# Altium PCB HIP4081A_rev1_pcb.PcbDoc
Units mil, origin at the board's own origin, x right, y up, seen from the top; angles counter-clockwise.
Board outline 3000 x 3000 mil, 2 copper layers (Top Layer, Bottom Layer); 26 components, 24 nets, 118 pads, 10 vias.
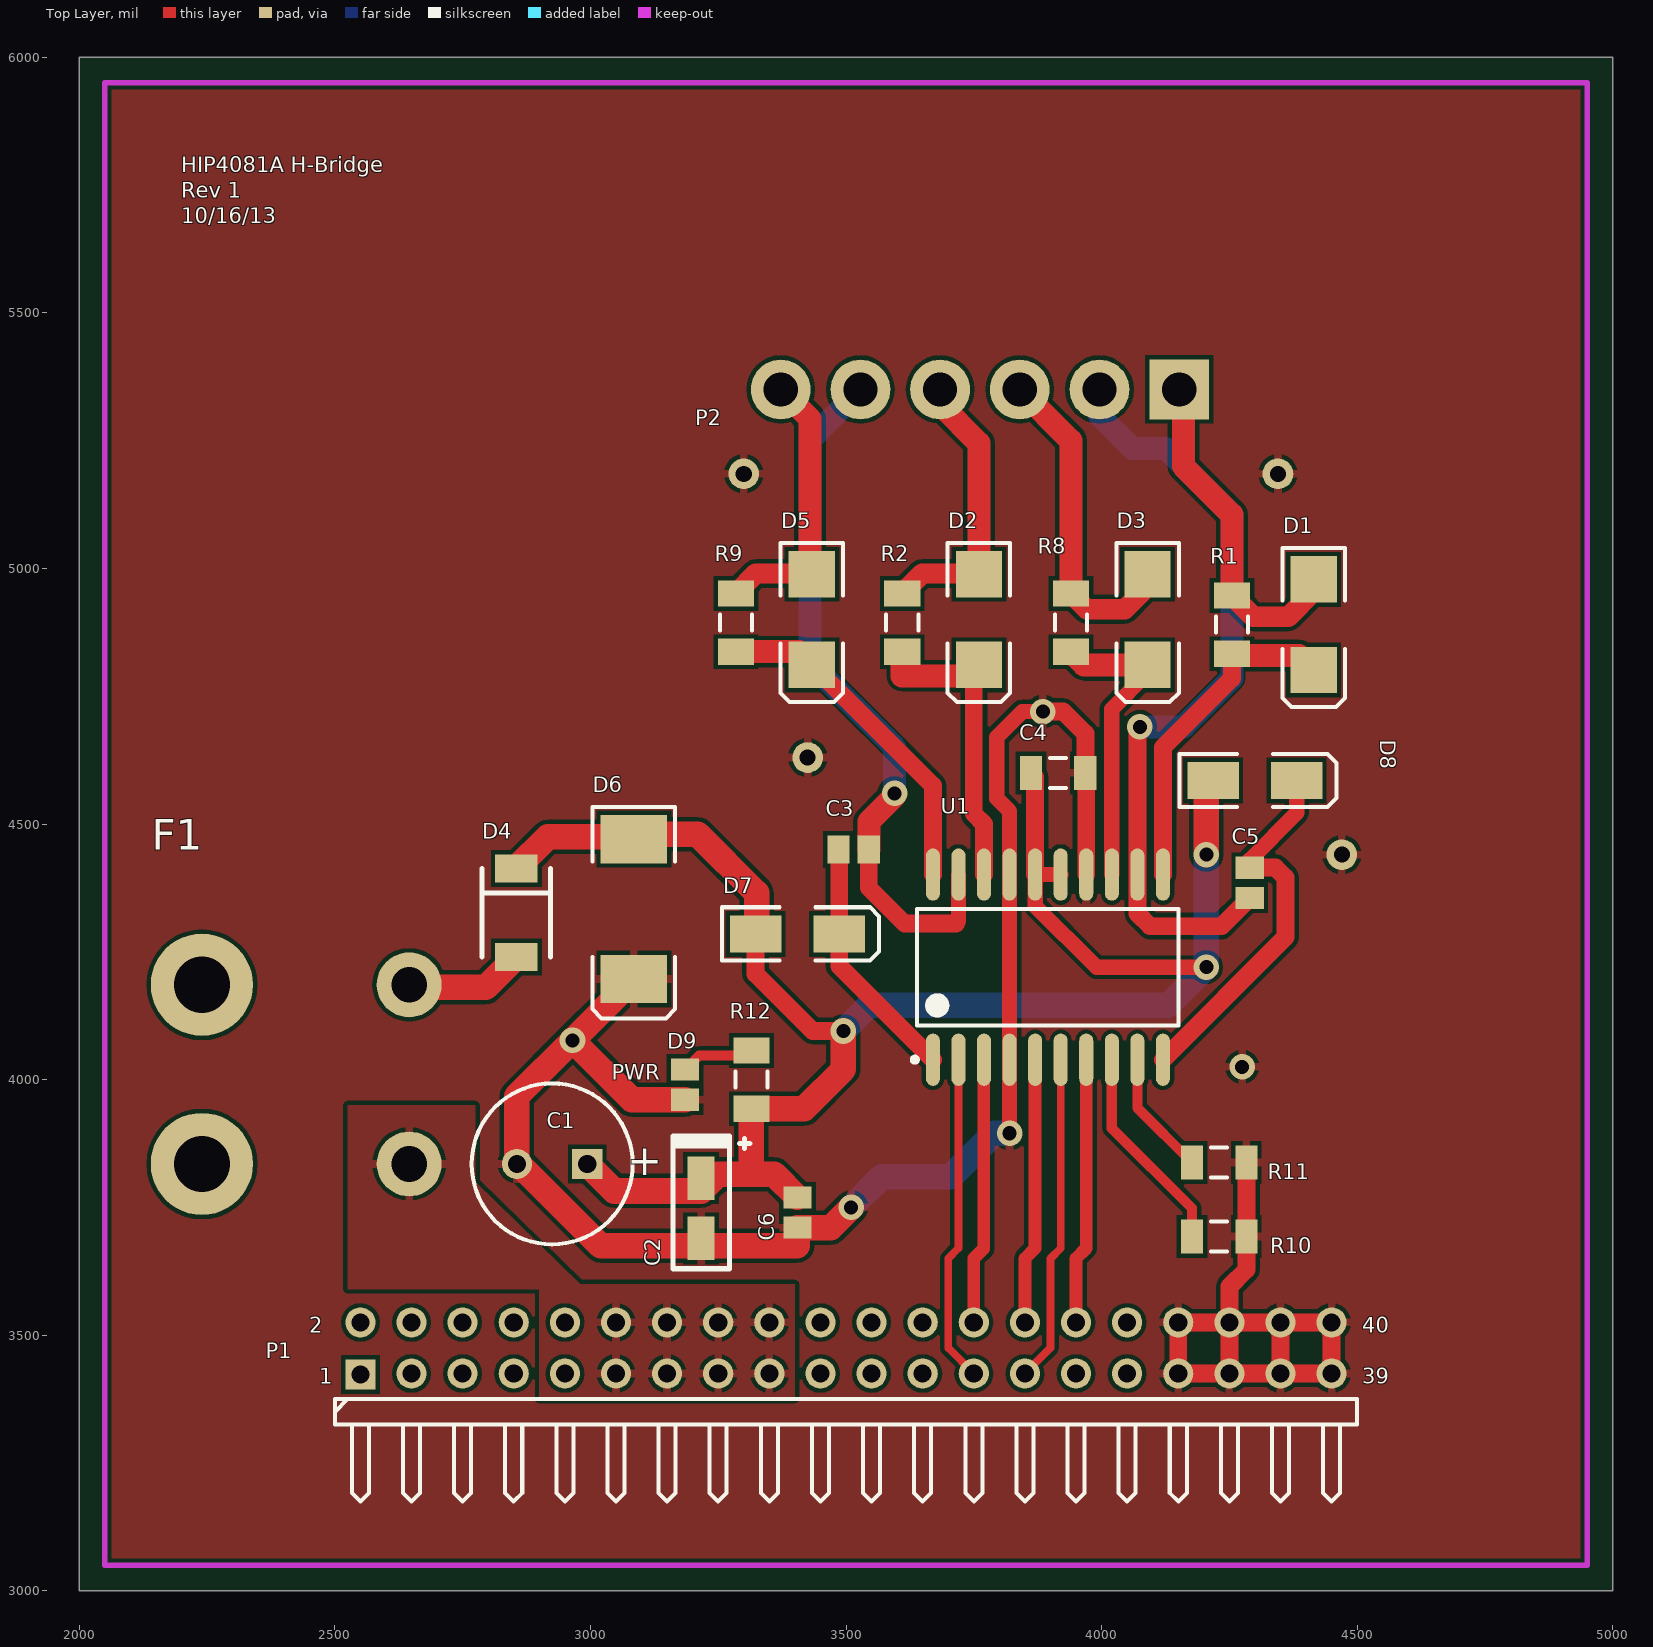
[diagram p0: Top Layer view]
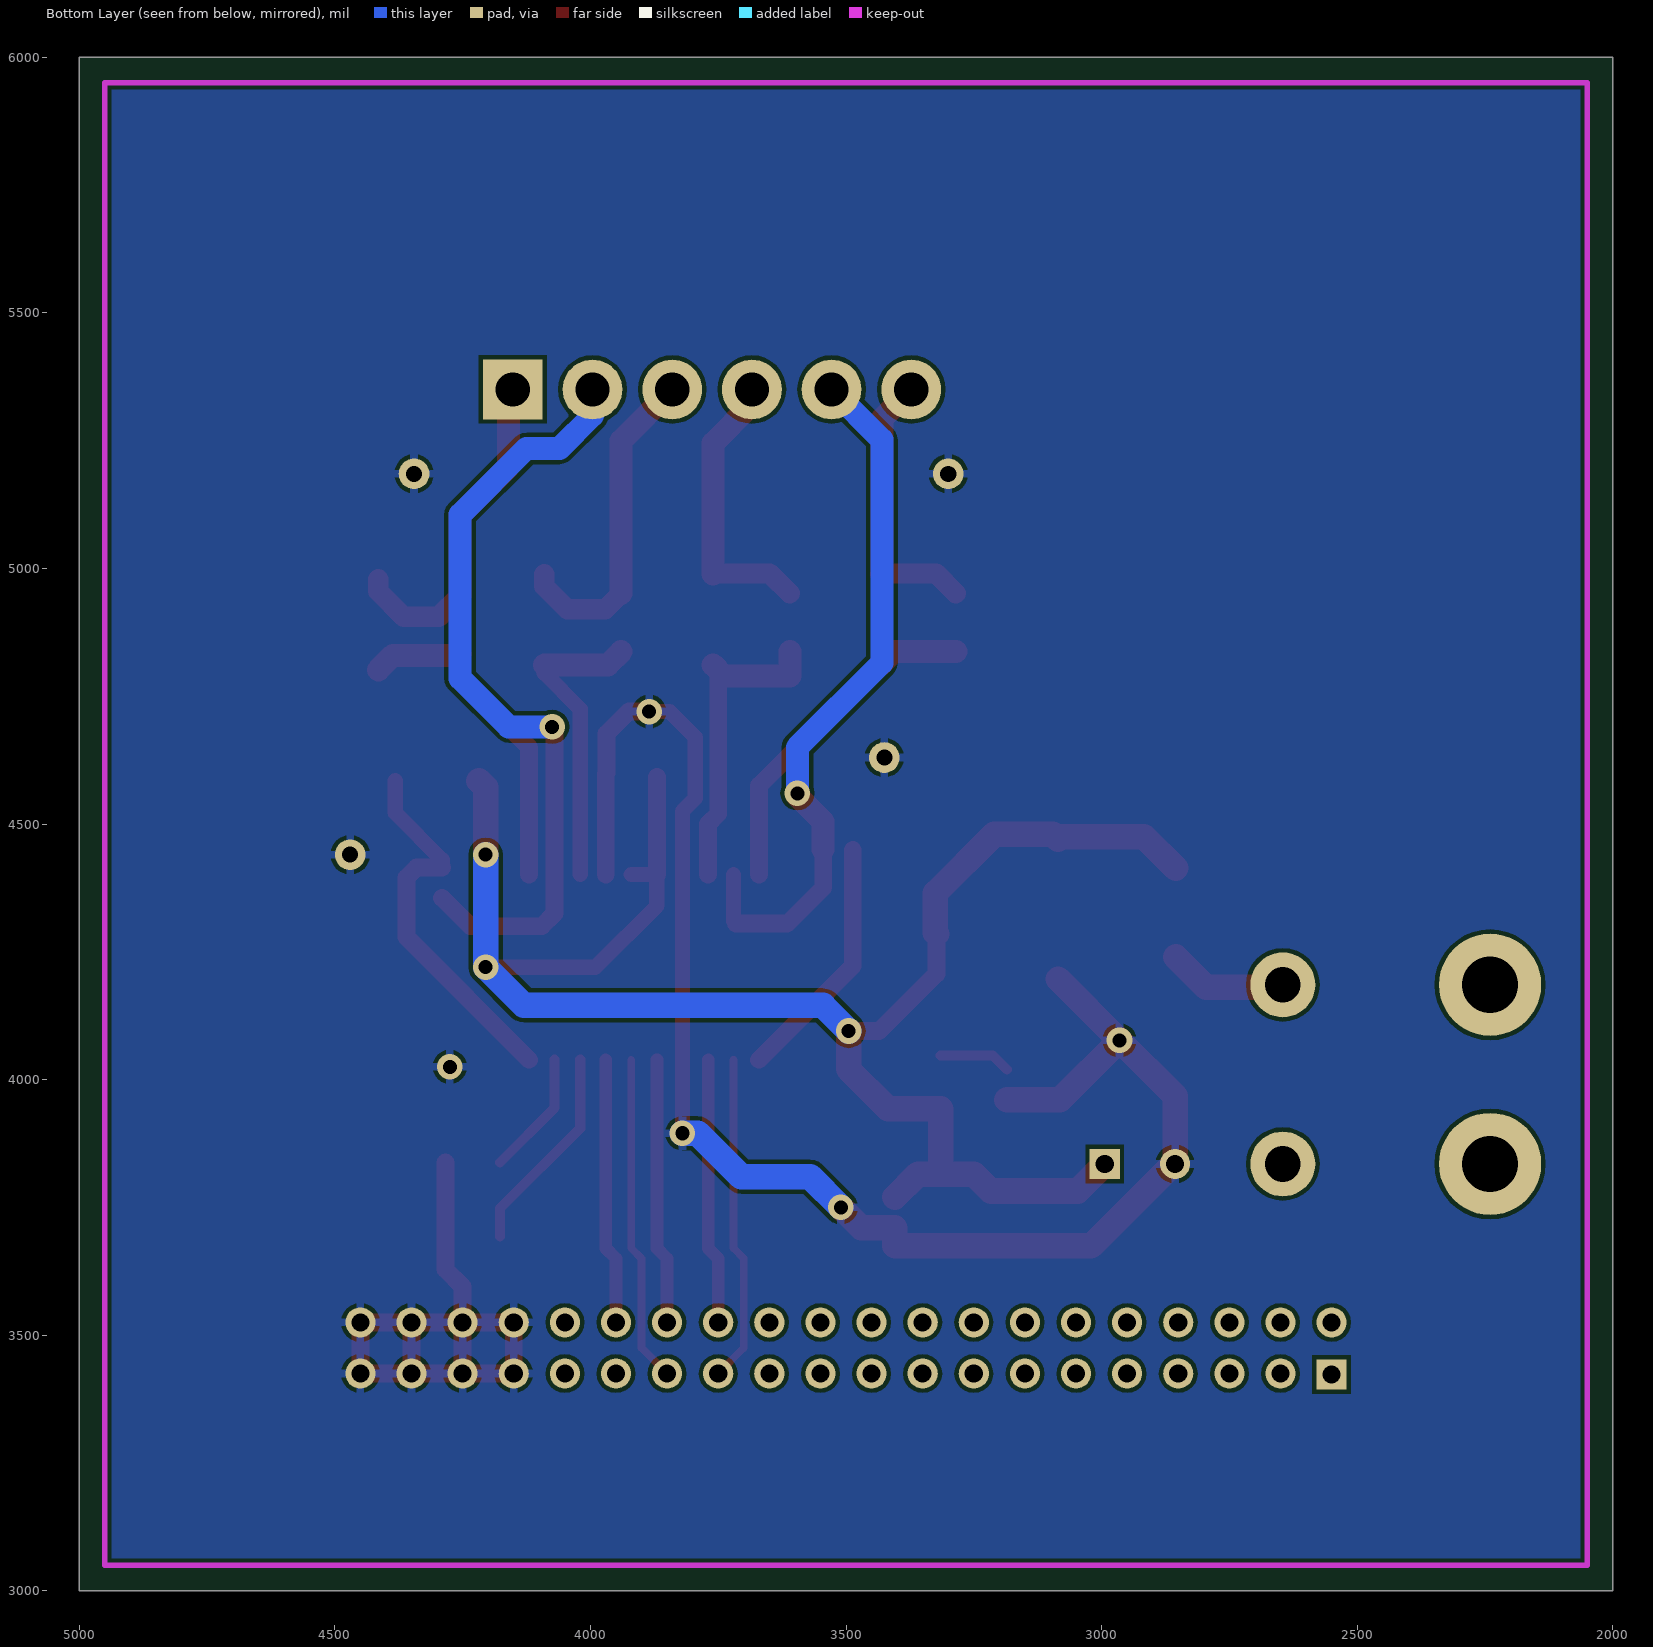
[diagram p1: Bottom Layer view, seen from below]

## Layer stack, top to bottom
Top Layer: signal copper 1.4
Dielectric: dielectric 12.6, FR-4, Dk 4.8
Bottom Layer: signal copper 1.4

## Board outline
2000,3000 5000,3000 5000,6000 2000,6000

## Design rules (kind name [scope] priority, off if disabled: settings)
Clearance [All] p1: gap=8
Height [All] p1: minheight=0 maxheight=4500 prefheight=500
HoleSize [All] p1: absolutevalues=TRUE maxlimit=120 minlimit=1 maxpercent=80.000 minpercent=20.000
MinimumSolderMaskSliver [All] p1: minsoldermaskwidth=5.6
PlaneConnect [All] p1: planeconnectstyle=Relief reliefexpansion=15 reliefentries=4 reliefconductorwidth=12 reliefairgap=25
PolygonConnect PolygonConnect_12v [InNamedPolygon('12v_Batt')] p1: connectstyle=Relief reliefconductorwidth=16 reliefentries=4 polygonreliefangle="90 Angle"
PolygonConnect [All] p2: connectstyle=Relief reliefconductorwidth=16 reliefentries=4 polygonreliefangle="90 Angle"
RoutingVias [All] p1: holewidth=27.56 width=50 viastyle="Through Hole" minholewidth=23.62 minwidth=50 maxholewidth=31.5 maxwidth=50
SilkscreenOverComponentPads [All] p1: minsilkscreentomaskgap=10
SolderMaskExpansion [All] p1: expansion=5
Width "Input Signal Nets" [(InNet('AHI') OR InNet('ALI') OR InNet('BHI') OR InNet('BLI')) OR InNet('DIS')] p1: maxlimit=35 minlimit=10 preferedwidth=25 toplayer_prefwidth=15 bottomlayer_minwidth=25 minimp=50.000000 maximp=50.000000 favimp=50.000000
Width Gate_Drive_Nets [(InNet('NetD1_1') OR InNet('NetD2_1') OR InNet('NetD3_1') OR InNet('NetD5_1') OR InNet('BHS') OR InNet('AHS')) OR InNet('BLO') OR InNet('BHO') OR InNet('ALO') OR InNet('AHO') OR InNet('NetC5_2') OR InNet('NetC3_2')] p2: maxlimit=45 minlimit=30 preferedwidth=35 minimp=50.000000 maximp=50.000000 favimp=50.000000
Width Power_Nets [InNet('NetD4_1')] p3: maxlimit=50 minlimit=50 preferedwidth=50 minimp=50.000000 maximp=50.000000 favimp=50.000000
Width Power_Width [(InNet('12V BATTERY') OR InNet('+12V') OR InNet('GND'))] p4: maxlimit=50 minlimit=30 preferedwidth=50 bottomlayer_minwidth=35 bottomlayer_prefwidth=35 minimp=50.000000 maximp=50.000000 favimp=50.000000
Width [All] p5: maxlimit=20 minlimit=12 preferedwidth=12 minimp=50.000000 maximp=50.000000 favimp=50.000000
23 further rules are at their usual default settings.

## Components (designator, comment, footprint, x,y, rotation, side; value= is the part's Value field where it differs from the comment)
C1 "Cap Alum" CAPPR3.5-8x11.5 2925,3835 r180 top
C2 "Cap Tant" CP1206 3216.65,3750 r270 top
C3 "0805" C0805 3515,4450 r180 top
C4 "0805" C1206 3915,4600 r0 top
C5 "0805" C0805 4290,4385 r90 top
C6 "0805" C0805 3405,3740 r90 top
D1 "D Schottky" SMB 4415,4890 r270 top
D2 "D Schottky" SMB 3760,4900 r270 top
D3 "D Schottky" SMB 4090,4900 r270 top
D4 "PMEG3030EP,115" SOD128 2855,4240 r90 top
D5 "D Schottky" SMB 3433.17,4900 r270 top
D6 "TVS" DSO-C2/X3.3 3085,4333.5 r270 top
D7 "Diode" DSO-C2/G1.6 3405,4285 r0 top
D8 "Diode" DSO-C2/G1.6 4300,4585 r0 top
D9 "LED2" C0805 3185,3990 r270 top
F1 "Fuse 2" "3550-2 ATC Fuse Holder" 2240,3835 r270 top
P1 "Header 20X2H" HDR2X20H 2550,3425 r0 top
P2 "Header 6" B6PS-VH 3840,5350 r180 top
R1 "1206" RESC3216N 4255,4890 r270 top
R2 "1206" RESC3216N 3610,4894.09 r270 top
R8 "1206" RESC3216N 3940,4894.09 r270 top
R9 "1206" RESC3216N 3285,4894.09 r270 top
R10 "1206" C1206 4230,3692.87 r180 top
R11 "1206" C1206 4230,3837.87 r180 top
R12 "1206" RESC3216N 3315,4000 r270 top
U1 "HIP4081A" SOIC127P1030-20M 3895,4220 r90 top

## Footprints (in the part's own frame and the unit in brackets; to place one, negate y for a bottom-side part, rotate by r counter-clockwise, add the part's x,y. Pads: shape width x height; smd on the part's side, far side on the other; paste and mask are expansions set on the pad)
"3550-2 ATC Fuse Holder" [mil]
  round 127 hole 70: 1(0,405.51) 2(-350.39,405.51)
  round 200 hole 110: 3(0,0) 4(-350.39,0)
  body extent -585,-5 235,395, height 214
B6PS-VH [mm]
  rect 2.972x2.972 hole 1.702: 1(-7.92,0)
  round 2.972 hole 1.702: 2(-3.96,0) 3(0,0) 4(3.96,0) 5(7.92,0) 6(11.88,0)
  body extent -9.91,-14.99 13.97,1.9, height 10.5
C0805 [mm] "Chip Capacitor, Body 2.0x1.3mm, IPC High Density"
  rect 1.1x1.4 smd: 1(-0.75,0) 2(0.75,0)
  body extent -1.1,-0.72 1.1,0.72, height 1.4
C1206 [mm] "Chip Capacitor, Body 3.2x1.6mm, IPC High Density"
  rect 1.1x1.7 smd: 1(-1.35,0) 2(1.35,0)
  silkscreen extent -0.4,-0.75 0.4,0.75, body extent -1.7,-0.9 1.7,0.9, height 1.3
CAPPR3.5-8x11.5 [mm] "Capacitor, Electrolytic, Radial; Body 8 x 11.5 mm (Dia.xH typ); Pin Spacing 3.5 mm (typ)"
  rect 1.5x1.5 hole 0.9: 1(-1.75,0)
  round 1.5 hole 0.9: 2(1.75,0)
  silkscreen extent -4,-4 4,4
CP1206 [mm] "1206 [ 3216 ] Polarized Pin 1 anode"
  rect 2.15x1.35 smd: 1(-1.45,0) 2(1.54,0)
  silkscreen extent -3.56,-1.4 3.05,2.41
DSO-C2/G1.6 [mm] "DO-214-AC/SMA; 2 C-Bend Leads; Body 5.3 x 2.6 mm, inc. leads (LxW)"
  rect 2.55x1.85 smd: 1(-2.075,0) 2(2.075,0)
  silkscreen extent -3.75,-1.33 4.05,1.33
DSO-C2/X3.3 [mm] "DO-214-AB/SMC; 2 C-Bend Leads; Body 7.9 x 5.9 mm, inc. leads (LxW)"
  rect 2.4x3.3 smd: 1(-3.475,0) 2(3.475,0)
  silkscreen extent -5.07,-2.05 5.43,2.05
HDR2X20H [mm] "Connector; Header; 20x2 Position; Right Angle"
  rect 1.5x1.5 hole 0.9: 1(0,-0.051)
  round 1.5 hole 0.9: 2(0,2.54) 3(2.54,0) 4(2.54,2.54) 5(5.08,0) 6(5.08,2.54) 7(7.62,0) 8(7.62,2.54) 9(10.16,0) 10(10.16,2.54) 11(12.7,0) 12(12.7,2.54) 13(15.24,0) 14(15.24,2.54) 15(17.78,0) 16(17.78,2.54) 17(20.32,0) 18(20.32,2.54) 19(22.86,0) 20(22.86,2.54) 21(25.4,0) 22(25.4,2.54) 23(27.94,0) 24(27.94,2.54) 25(30.48,0) 26(30.48,2.54) 27(33.02,0) 28(33.02,2.54) 29(35.56,0) 30(35.56,2.54) 31(38.1,0) 32(38.1,2.54) 33(40.64,0) 34(40.64,2.54) 35(43.18,0) 36(43.18,2.54) 37(45.72,0) 38(45.72,2.54) 39(48.26,0) 40(48.26,2.54)
  silkscreen extent -1.27,-6.35 49.53,-1.27
RESC3216N [mm] "Chip Resistor, Body 3.2x1.6mm, IPC Medium Density"
  rect 1.3x1.8 smd: 1(-1.45,0) 2(1.45,0)
  silkscreen extent -0.4,-0.8 0.4,0.8, body extent -1.68,-0.87 1.68,0.87, height 0.71
SMB [mm] "DO-214-AA/SMB; 2 C-Bend Leads; Body 5.3 x 3.6 mm, inc. leads (LxW)"
  rect 2.3x2.3 smd: 1(-2.25,0) 2(2.25,0)
  silkscreen extent -3.8,-1.55 4.1,1.55
SOD128 [mm] "SOD 128 Diode"
  rect 1.4x2.1 smd: 1(0,0) 2(4.4,0)
  silkscreen extent 0,-1.7 4.4,1.7
SOIC127P1030-20M [mm] "SOIC, 20-Leads, Body 12.8x7.5mm, Pitch 1.27mm, IPC Low Density"
  oval 2.6x0.7 smd: 1(-4.6,5.715) 2(-4.6,4.445) 3(-4.6,3.175) 4(-4.6,1.905) 5(-4.6,0.635) 6(-4.6,-0.635) 7(-4.6,-1.905) 8(-4.6,-3.175) 9(-4.6,-4.445) 10(-4.6,-5.715) 11(4.6,-5.715) 12(4.6,-4.445) 13(4.6,-3.175) 14(4.6,-1.905) 15(4.6,-0.635) 16(4.6,0.635) 17(4.6,1.905) 18(4.6,3.175) 19(4.6,4.445) 20(4.6,5.715)
  silkscreen extent -4.72,-6.5 2.9,6.74, body extent -3.75,-6.5 3.75,6.5, height 2.65

## Part data
C1: library part "Cap Pol1", "Polarized Capacitor (Radial)"
C2: library part "Cap Pol3", "Polarized Capacitor (Surface Mount)"
C3 C4 C5 C6: library part "Cap Semi", "Capacitor (Semiconductor SIM Model)"
D1 D2 D3 D5: "Schottky Diode"
D4: library part "D Schottky"
D6: library part TVS_Bi, "Bi-directional TVS diode"
D7 D8: "Default Diode"
D9: "Ultra Bright YELLOW ORANGE AlInGaP LED"
F1: "Fuse"
P1: "Header, 20-Pin, Dual row, Right Angle"
P2: "Header, 6-Pin"
R1 R2 R8 R9 R10 R11 R12: library part Res3, "Resistor"
U1: "80V/2.5A Peak, High Frequency Full Bridge FET Driver"

## Free pads (board coordinates)
  round 60 hole 31.5: 1(3300,5185) 2(3425,4630) 3(4345,5185) 4(4470,4440)

## Via types
v1: diameter 50, hole 27.56, Top Layer to Bottom Layer, 10 vias

## Nets (pads, with @x,y where several pads share a name; then routed paths per layer and width w, separated by ;. In a path a pad name is that pad's centre, name@x,y a point inside that pad or via, vN(x,y) a via of type N, cw(c..) or ccw(c..) an arc to the next point about the centre after c; other vN are vias at no path point)
"12V BATTERY": F1.1 P1.11 P1.12 P1.13 P1.14 P1.15 P1.16 P1.17 P1.18
+12V: C1.1 C2.1 C4.1 C6.2 D4.2 D6.1 D7.1 D8.1 R12.2 U1.15 U1.16 | length 3617.7
  Top Layer w30: U1.15 U1.16 3870,4340 3990,4220 v1(4205,4220)
  Top Layer w35: D7.1@3322.91,4285.39 D7.1 3323.31,4206.69 3435,4095 v1(3495,4095) ; U1.16 C4.1@3870,4591.85
  Top Layer w50: D4.2 2916.77,4475 3080.31,4475 D6.1 3094.69,4480 3210,4480 3325,4365 3325,4287.48 D7.1@3322.91,4285.39 ; C1.1 3046.81,3782.09 3216.65,3782.09 3249.57,3815 3359.53,3815 C6.2 ; 3315,3815 R12.2@3315,3935 ; R12.2 3417.91,3942.91 3495,4020 v1(3495,4095) ; v1(4205,4440) 4205,4571.69 D8.1
  Bottom Layer w50: v1(3495,4095) 3545,4145 4130,4145 v1(4205,4220) v1(4205,4440)
AHI: P1.30 U1.7 | length 522.2
  Top Layer w25: P1.30 3950,3650 3970,3670 U1.7
AHO: D1.2 R1.2 U1.11 | length 660.8
  Top Layer w35: U1.11 4120,4650 4255,4785 R1.2
  Top Layer w45: R1.2 4257.91,4830 4386.42,4830 D1.2
AHS: C5.1 P2.2 U1.12 | length 1550.2
  Top Layer w35: v1(4075,4690) 4070,4685 U1.12 4070,4325 4095,4300 4234.53,4300 C5.1
  Bottom Layer w45: P2.2 3995.91,5299.09 4060,5235 4125,5235 4255,5105 4255,4785 4160,4690 v1(4075,4690)
ALI: P1.27 U1.6 | length 642.9
  Top Layer w15: P1.27 3900,3475 3900,3650 3920,3670 U1.6
ALO: D3.2 R8.2 U1.13 | length 599.9
  Top Layer w30: U1.13 4020,4725 4090,4795 D3.2
  Top Layer w45: R8.2 3965.59,4811.42 D3.2
BHI: P1.25 U1.2 | length 642.9
  Top Layer w15: U1.2 3720,3670 3700,3650 3700,3475 P1.25
BHO: D5.2 R9.2 U1.20 | length 667.4
  Top Layer w35: D5.2@3433.58,4811.42 3670,4575 U1.20
  Top Layer w45: R9.2 3407.58,4837.01 D5.2 D5.2@3433.58,4811.42
BHS: C3.1 P2.5 U1.19 | length 1402.3
  Top Layer w30: 3715,4305 3720,4310 U1.19
  Top Layer w35: C3.1 3544.53,4375.47 3615,4305 3715,4305
  Top Layer w45: C3.1 3544.53,4504.53 3595,4555 v1(3595,4560)
  Bottom Layer w45: P2.5 3430,5251.81 3430,4815 3595,4650 v1(3595,4560)
BLI: P1.28 U1.5 | length 522.2
  Top Layer w25: P1.28 3850,3650 3870,3670 U1.5
BLO: D2.2 R2.2 U1.18 | length 614.5
  Top Layer w30: D2.2@3738.58,4790 D2.2@3750,4801.42
  Top Layer w35: D2.2@3750,4801.42 3750,4520 3770,4500 U1.18
  Top Layer w45: R2.2 3610,4790 D2.2@3738.58,4790 ; D2.2@3750,4801.42 D2.2
DIS: P1.26 U1.3 | length 521.5
  Top Layer w25: P1.26 3750,3650 3769.5,3669.5 U1.3@3769.5,4038.4
GND: C1.2 C2.2 C4.2 C6.1 D6.2 D9.2 P1.33 P1.34 P1.35 P1.36 P1.37 P1.38 P1.39 P1.40 pad.1 pad.2 pad.3 pad.4 R10.1 R11.1 U1.4 U1.14 U1.17 | length 4459.3
  Top Layer w30: v1@3820,3900 U1.4 U1.17 3820,4525 3795,4550 3795,4670 3845,4720 v1(3885,4720)
  Top Layer w35: v1(3885,4720) 3925,4720 3968.15,4676.85 C4.2 ; U1.14 C4.2@3970,4598.15 ; R11.1 R10.1 4283.15,3628.15 4250,3595 P1.36 ; P1.35 P1.37 ; P1.35 P1.36 ; P1.35 P1.33 P1.34 P1.36 ; P1.36 P1.38 ; P1.37 P1.38 ; P1.37 P1.39 P1.40 P1.38
  Top Layer w50: D6.2 v1(2965,4076.69) ; D9.2 3081.22,3960.47 v1(2965,4076.69) ; v1(3510,3750) 3470.47,3710.47 C6.1 3405,3675 3020,3675 2860,3835 C1.2 2856.1,3967.8 v1(2965,4076.69)
  Bottom Layer w50: v1(3510,3750) 3570,3810 3705,3810 3790,3895 v1(3820,3895)
  other v1: 4275,4025
NetC3_2: C3.2 D7.2 U1.1 | length 485.8
  Top Layer w35: C3.2@3486.69,4448.78 D7.2 3486.69,4222.2 U1.1
NetC5_2: C5.2 D8.2 U1.10 | length 742.1
  Top Layer w30: C5.2 4290,4430 4381.69,4521.69 D8.2
  Top Layer w35: U1.10 4360,4278.9 4360,4395 4340.47,4414.53 C5.2
NetD1_1: D1.1 P2.1 R1.1 | length 667.4
  Top Layer w40: R1.1 4297.09,4905 4365,4905 4415,4955 D1.1
  Top Layer w45: P2.1 4160,5341.81 4160,5200 4255,5105 R1.1
NetD2_1: D2.1 P2.4 R2.1 | length 559.5
  Top Layer w40: R2.1 3648.82,4990 D2.1@3758.58,4990
  Top Layer w45: P2.4 3684.09,5320.91 3760,5245 D2.1 D2.1@3758.58,4990
NetD3_1: D3.1 P2.3 R8.1 | length 645.4
  Top Layer w40: R8.1 3971.18,4920 4045,4920 4090,4965 D3.1
  Top Layer w45: P2.3 3940,5250 R8.1
NetD4_1: D4.1 F1.2 | length 234.2
  Top Layer w50: F1.2@2645.51,4180.39 2795.39,4180.39 D4.1
NetD5_1: D5.1 P2.6 R9.1 | length 551.5
  Top Layer w40: R9.1 3323.82,4990 3431.76,4990 D5.1 D5.1@3430,4991.76
  Top Layer w45: P2.6 3430,5292.28 D5.1@3430,4991.76
NetD9_1: D9.1 R12.1 | length 141.4
  Top Layer w20: D9.1 3212.56,4047.09 R12.1@3315,4047.09
NetR10_2: R10.2 U1.8 | length 411
  Top Layer w20: U1.8 4020,3905 4176.85,3748.15 R10.2
NetR11_2: R11.2 U1.9 | length 245.3
  Top Layer w20: U1.9 4070,3944.72 R11.2
pads on no net: F1.3 F1.4 P1.1 P1.2 P1.3 P1.4 P1.5 P1.6 P1.7 P1.8 P1.9 P1.10 P1.19 P1.20 P1.21 P1.22 P1.23 P1.24 P1.29 P1.31 P1.32

## Polygon pours and split planes (outlines as drawn)
GND on Top Layer "GND_TopLayer" (solid, remove dead copper, pour order 5): 2000,6000 5000,6000 5000,3000 2000,3000
"12V BATTERY" on Top Layer "12v_Batt" (solid, remove dead copper, pour order 29): 3400,3600 3400,3375 2900,3375 2900,3590 2525,3590 2525,3950 2775,3950 2775,3800 2980,3600
GND on Bottom Layer "GND_BottomLayer" (solid, remove dead copper, pour order 7): 2000,6000 4999,6000 5000,5999 5000,2998 2001,2998 2000,2999

## Keep-outs
Keep-Out Layer:
  lines w10: 2050,3050 4950,3050 4950,5950 2050,5950 2050,3050

## Silkscreen, mask and mechanical layers (free items; w line width, h text height)
Top Overlay:
  text "HIP4081A H-Bridge" at 2200,5775 h30
  text "Rev 1" at 2200,5725 h30
  text "10/16/13" at 2200,5675 h30
  text "PWR" at 3041.69,4000 h30
Drill Drawing:
  text ".LEGEND" at 5200,3200 h60
  text "Drill Drawing." at 5200,3100 h60

## Dimensions
2050,3050 to 4950,3050 on Mechanical 1
2050,3050 to 2050,5950 on Mechanical 1

## Text inside footprints (layer, text, board x,y; h text height)
C1: Top Overlay "+" at 3140.55,3864.53 h59.06 r180
P1: Top Overlay "40" at 4510,3505 h30; Top Overlay "39" at 4510,3405 h30; Top Overlay "1" at 2470,3405 h30; Top Overlay "2" at 2450,3505 h30